# Altium PCB 12V DC.PcbDoc
Units mil, origin at the board's own origin, x right, y up, seen from the top; angles counter-clockwise.
Board outline 4500 x 1800 mil, 2 copper layers (Top Layer, Bottom Layer); 40 components, 24 nets, 114 pads, 16 vias.
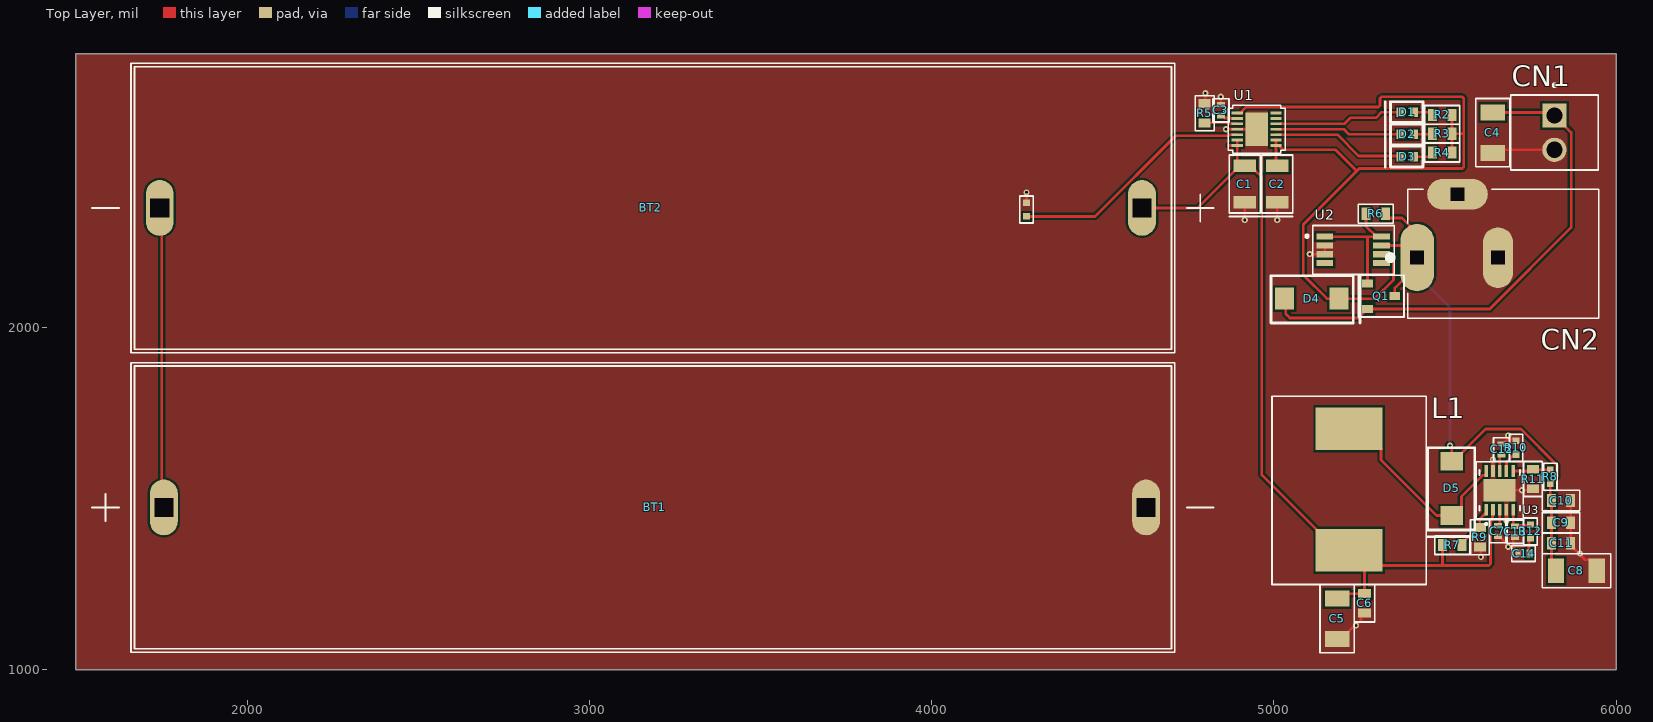
[diagram p0: Top Layer view]
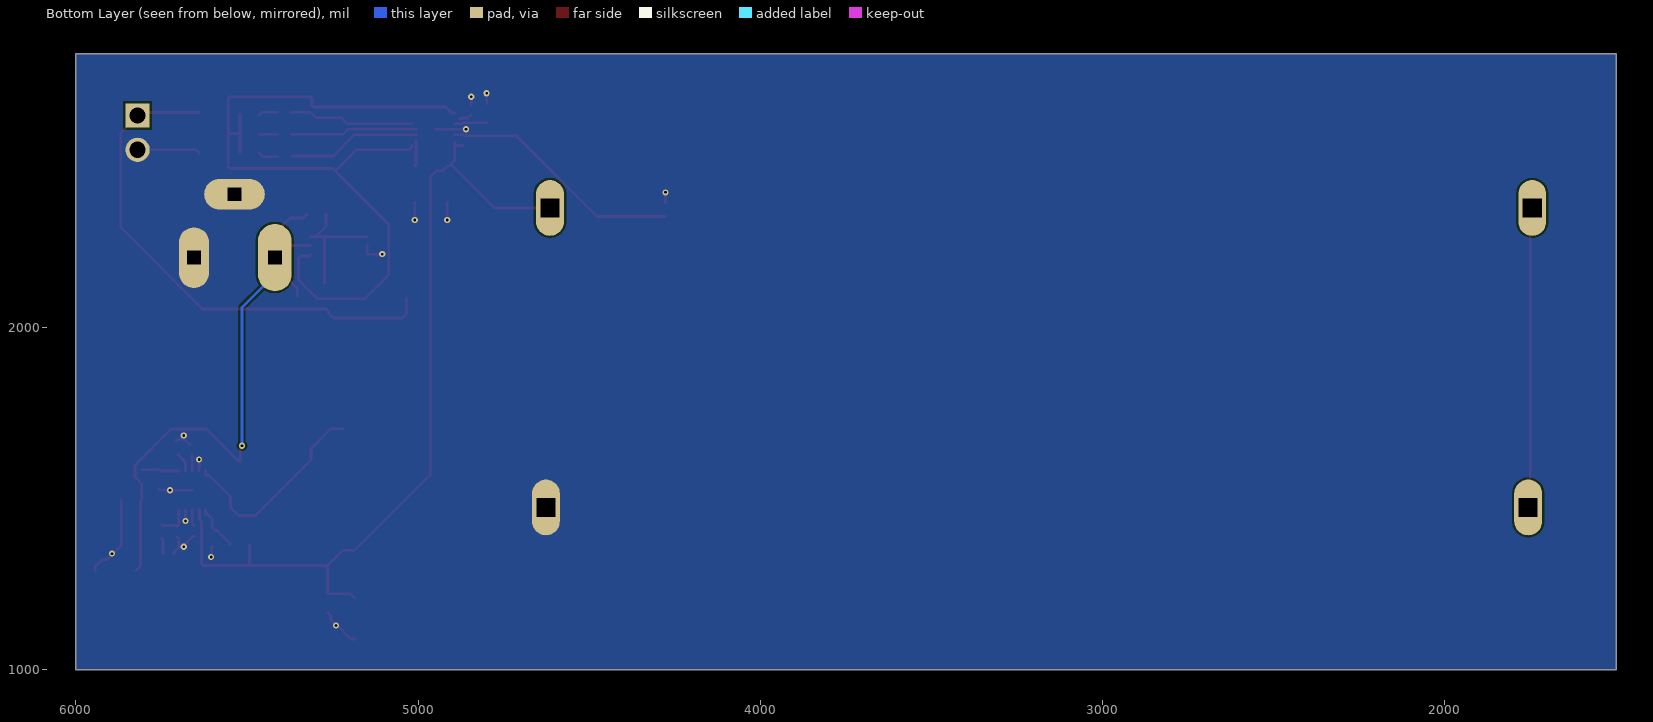
[diagram p1: Bottom Layer view, seen from below]
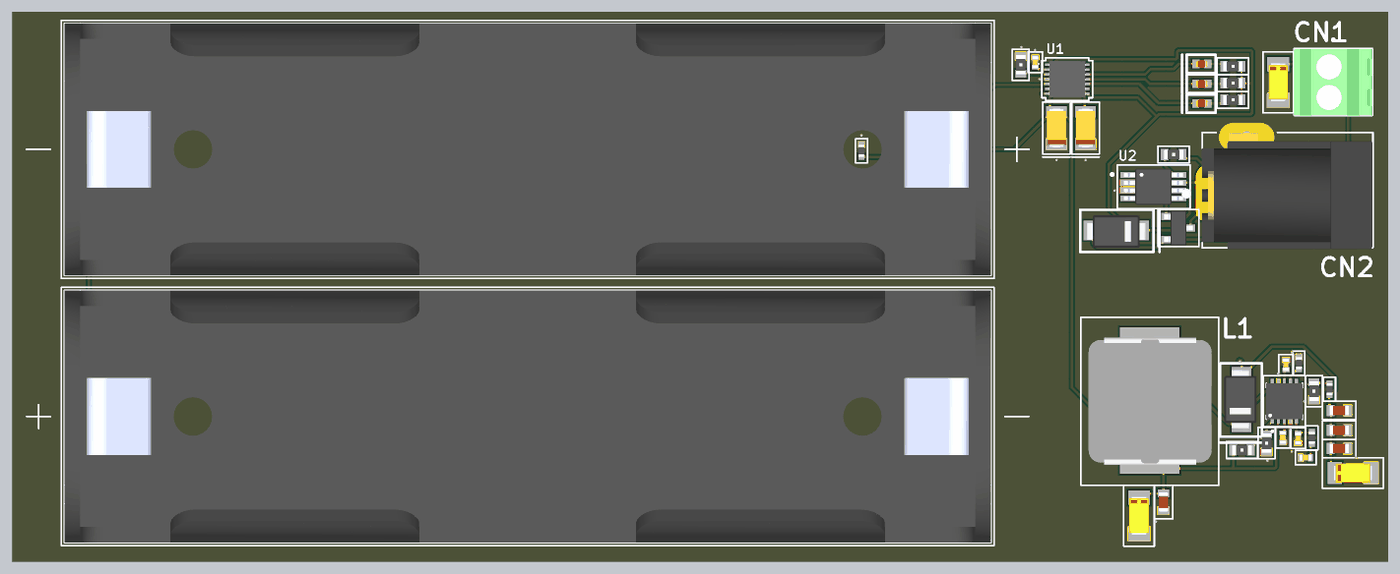
[diagram p2: 3D render of the assembled board from above, using the file's embedded part models]

## Layer stack, top to bottom
Top Solder: solder mask 0.4, Solder Resist, Dk 3.5
Top Layer: signal copper 1.4
Dielectric 1: dielectric 12.6, FR-4, Dk 4.8
Bottom Layer: signal copper 1.4
Bottom Solder: solder mask 0.4, Solder Resist, Dk 3.5

## Board outline
1500,2800 6000,2800 6000,1000 1500,1000

## Design rules (kind name [scope] priority, off if disabled: settings)
Clearance Clearance_1 [InNet('EXT_5V') vs InNet('VDD33')] p1: gap=20 ignorepadtopadclearanceinfootprint=FALSE
Clearance PWR_clearence [InNetClass('PWR') vs InNetClass('PWR')] p2: gap=15 ignorepadtopadclearanceinfootprint=TRUE
Clearance clearance [All] p3: gap=6 ignorepadtopadclearanceinfootprint=TRUE except(0: SMDPad-Via SMDPad-Hole THPad-Via)
ComponentClearance [All] p1: gap=10 collisioncheckmode=3 verticalgap=10 showdistances=TRUE
DiffPairsRouting 24 [InDifferentialPair('24RF')] p1: maxlimit=8 minlimit=5 mostfreqgap=8 toplayer_mingap=8 toplayer_minwidth=8 toplayer_maxwidth=8 toplayer_prefwidth=8 bottomlayer_maxgap=5 bottomlayer_prefgap=5 bottomlayer_minwidth=4.17 bottomlayer_maxwidth=4.17 bottomlayer_prefwidth=4.17 impedanceprofiledriven=TRUE maxuncoupledlength=500
DiffPairsRouting 09 [InDifferentialPair('09RF')] p2: maxlimit=8 minlimit=5 mostfreqgap=8 toplayer_mingap=8 toplayer_minwidth=8 toplayer_maxwidth=8 toplayer_prefwidth=8 bottomlayer_maxgap=5 bottomlayer_prefgap=5 bottomlayer_minwidth=4.17 bottomlayer_maxwidth=4.17 bottomlayer_prefwidth=4.17 impedanceprofiledriven=TRUE maxuncoupledlength=500
HoleSize [All] p1: absolutevalues=TRUE maxlimit=196.85 minlimit=1 maxpercent=80.000 minpercent=20.000
MatchedLengths [InNetClass('SPI')] p1: tolerance=5 checknetsindiffpair=FALSE checkdiffpairvsdiffpair=TRUE checkxsignals=TRUE checkothers=TRUE
MinimumSolderMaskSliver [All] p1: minsoldermaskwidth=2
NetAntennae [All] p1: netantennaetolerance=3
PlaneClearance [All] p1: clearance=10
PlaneConnect [All] p1: planeconnectstyle=Direct reliefexpansion=20 reliefentries=4 reliefconductorwidth=10 reliefairgap=10
PolygonConnect [All] p1: connectstyle=Direct reliefconductorwidth=10 reliefentries=4 polygonreliefangle="90 Angle" airgapwidth=0
PolygonConnect PolygonConnect_1 [All] p2: connectstyle=Direct reliefconductorwidth=10 reliefentries=4 polygonreliefangle="90 Angle" airgapwidth=10
PolygonConnect GND [InNet('GND')] p3: connectstyle=Direct reliefconductorwidth=10 reliefentries=4 polygonreliefangle="90 Angle" airgapwidth=10
PolygonConnect PWR [InNet('VBAT') or InNet('5VSYS')  or InNet('NetL1_1')] p4: connectstyle=Direct reliefconductorwidth=10 reliefentries=4 polygonreliefangle="90 Angle" airgapwidth=10
PolygonConnect VDD33 [InNet('VDD33')] p5: connectstyle=Direct reliefconductorwidth=10 reliefentries=4 polygonreliefangle="90 Angle" airgapwidth=10
PolygonConnect PWRHOLE [InNet('5VSYS') vs (ObjectKind = 'Pad') And (Layer = 'MultiLayer') And (Net = '5VSYS')] p6: connectstyle=Direct reliefconductorwidth=10 reliefentries=4 polygonreliefangle="90 Angle" airgapwidth=10
RoutingVias [All] p1: holewidth=8 width=18 viastyle="Through Hole" minholewidth=6 minwidth=6 maxholewidth=25 maxwidth=40
SilkToSilkClearance [All] p1: silktosilkclearance=1
SilkToSolderMaskClearance [IsPad] p1: minsilkscreentomaskgap=0 clearancetoexposedcopper=TRUE
SolderMaskExpansion [All] p1: expansion=2 istentingtop=FALSE useseparateexpansions=TRUE expansionbottom=2 istentingbottom=FALSE
UnRoutedNet [All] p1: checkbadconnections=TRUE
Width [All] p1: maxlimit=80 minlimit=6 preferedwidth=6 minimp=50.000000 maximp=50.000000 favimp=50.000000
20 further rules are at their usual default settings.

## Components (designator, comment, footprint, x,y, rotation, side; value= is the part's Value field where it differs from the comment)
BT1 "BK-18650-PC2" 18650 3185.87,1475 r0 top
BT2 "BK-18650-PC2" 18650 3185.87,2350 r180 top
C1 "CAP_POL" CAP_3216 4915,2420 r90 top value=10uF
C2 "CAP_POL" CAP_3216 5010,2420 r90 top value=10uF
C3 "Capacitor_0402" Capacitor_0402 4845,2635 r270 top value=100nF
C4 "CAP_1206" CAP_1206 5640,2570 r90 top value=47uf
C5 "CAP_1206" CAP_1206 5185,1150 r90 top value=47uf
C6 "Capacitor_0603" Capacitor_0603 5265,1195 r90 top value=4.7uF
C7 "Capacitor_0402" Capacitor_0402 5655.36,1406.36 r90 top value=1uF
C8 "CAP_1206" CAP_1206 5884.25,1290 r180 top value=47uf
C9 "Capacitor_0603" Capacitor_0603 5839.25,1430 r180 top value=4.7uF
C10 "Capacitor_0603" Capacitor_0603 5839.25,1495 r0 top value=4.7uF
C11 "Capacitor_0603" Capacitor_0603 5839.25,1370 r180 top value=4.7uF
C12 "Capacitor_0402" Capacitor_0402 5665,1643.89 r270 top value=1nF
C13 "Capacitor_0402" Capacitor_0402 5705.36,1404.36 r90 top value=5.1pF
C14 "Capacitor_0402" Capacitor_0402 5730,1340 r0 top value=560pF
CN1 "2 Position Wire Terminal" 282834-2 5820,2570 r270 top
CN2 "PJ-202A" PJ-202A 5674.69,2204 r0 top
D1 "LED" LED_0402 5370.63,2630 r0 top
D2 "LED" LED_0402 5370.63,2565 r0 top
D3 "LED" LED_0402 5370.63,2500 r0 top
D4 "CDBA240LL-HF" DO-214AC 5031.34,2085 r0 top
D5 "CDBA240LL-HF" DO-214AC 5520,1610 r270 top
L1 "IHLP4040DZER5R6M01" Inductor_4040 5220,1350 r90 top value="100 kHz"
Q1 "DMP2045U-7" SOT-23 5310,2095 r270 top
R1 "Thermistor_0402" Resistor_0402 4275,2345 r90 top value=10K
R2 "Resistor_0603" Resistor_0603 5490,2620 r180 top value=2K
R3 "Resistor_0603" Resistor_0603 5490,2565 r180 top value=2K
R4 "Resistor_0603" Resistor_0603 5490,2510 r180 top value=2K
R5 "Resistor_0603" Resistor_0603 4800,2625 r270 top value=1.78K
R6 "Resistor_0603" Resistor_0603 5300,2335 r0 top value=47
R7 "Resistor_0603" Resistor_0603 5519.46,1363 r180 top value=620K
R8 "Resistor_0402" Resistor_0402 5810,1565 r270 top value=130K
R9 "Resistor_0603" Resistor_0603 5600,1390 r90 top value=205
R10 "Resistor_0402" Resistor_0402 5710,1650 r270 top value=97.6K
R11 "Resistor_0603" Resistor_0603 5755,1560 r90 top value=20.5K
R12 "Resistor_0402" Resistor_0402 5747.61,1404.47 r90 top value=118K
U1 "AAT3663IWO-8.4-2-T1" 14-TDFN 4950,2580 r0 top
U2 "LTC4414EMS8#PBF" 8-MSOP 5231.93,2227.8 r0 top
U3 "LT8362EDD#PBF" 10-DFN 5660,1525 r90 top

## Footprints (in the part's own frame and the unit in brackets; to place one, negate y for a bottom-side part, rotate by r counter-clockwise, add the part's x,y. Pads: shape width x height; smd on the part's side, far side on the other; paste and mask are expansions set on the pad)
8-MSOP [mm]
  rect 1.25x0.46 smd: 1(-2.11,0.975) 2(-2.11,0.325) 3(-2.11,-0.325) 4(-2.11,-0.975) 5(2.11,-0.975) 6(2.11,-0.325) 7(2.11,0.325) 8(2.11,0.975)
  silkscreen extent -3.53,-1.83 3.05,1.8, body extent -2.45,-1.5 2.45,1.5, height 1.1
10-DFN [mm]
  rect 0.86x0.27 smd mask+0.05: 1(-1.435,1) 2(-1.435,0.5) 3(-1.435,0) 4(-1.435,-0.5) 5(-1.435,-1) 6(1.435,-1) 7(1.435,-0.5) 8(1.435,0) 9(1.435,0.5) 10(1.435,1)
  rect 1.65x2.38 smd paste-2 mask+0.05: 11(0,0)
  silkscreen extent -2.55,-1.75 2.11,1.75, body extent -1.5,-1.5 1.5,1.5, height 0.8
14-TDFN [mm]
  rect 0.83x0.2 smd: 1(-1.44,1.2) 2(-1.44,0.8) 3(-1.44,0.4) 4(-1.44,0) 5(-1.44,-0.4) 6(-1.44,-0.8) 7(-1.44,-1.2) 8(1.44,-1.2) 9(1.44,-0.8) 10(1.44,-0.4) 11(1.44,0) 12(1.44,0.4) 13(1.44,0.8) 14(1.44,1.2)
  rect 1.65x2.5 smd paste-2: 15(0,0)
  silkscreen extent -2.46,-1.78 2.11,1.78, body extent -1.55,-1.5 1.55,1.5, height 0.8
18650 [mm]
  oval 2.07x4.14 hole 1.38 square: 1(36.6,0) 2(-36.3,0)
  round 3.2 on Mech13: ""(-27.805,0) ""(27.81,0)
  silkscreen extent -41.63,-10.74 41.63,10.74, body extent -38.48,-10.49 38.48,10.49, height 21.42
282834-2 [mm]
  rect 1.8x1.8 hole 1.2: 1(-1.27,0)
  round 1.8 hole 1.2: 2(1.27,0)
  silkscreen extent -3.62,-3.25 2.77,3.25, body extent -2.77,-3.25 2.77,3.25, height 10.01
CAP_1206 [mm]
  rect 1.2x1.82 smd: 1(-1.505,0) 2(1.505,0)
  silkscreen extent -2.54,-1.27 2.54,1.27, body extent -1.6,-0.8 1.6,0.8, height 1.81
CAP_3216 [mm]
  rect 0.95x1.7 smd: 1(-1.35,0) 2(1.35,0)
  silkscreen extent -2.41,-1.14 2.16,1.14, body extent -1.6,-0.8 1.6,0.8, height 1.81
Capacitor_0402 [mm]
  rect 0.4x0.6 smd: 1(-0.416,0.009) 2(0.397,0.009)
  silkscreen extent -0.87,-0.59 0.85,0.61, body extent -0.51,-0.24 0.49,0.26, height 0.56
Capacitor_0603 [mil]
  rect 26x37 smd: 1(-28,0) 2(28,0)
  silkscreen extent -55,-30 55,30, body extent -31,-16 31,16, height 36
DO-214AC [mm]
  rect 1.4x1.64 smd: 1(0,0) 2(4.03,0)
  silkscreen extent -1,-1.8 5.6,1.7, body extent -0.5,-1.45 4.5,1.25, height 2.32
Inductor_4040 [mil]
  rect 125x195 smd: 1(0,0) 2(355,0)
  silkscreen extent -100,-225 450,225, body extent -34,-202 384,200, height 153
LED_0402 [mm]
  rect 0.6x0.7 smd: 1(0,0) 2(1,0)
  silkscreen extent -1.14,-0.76 1.65,0.76, body extent 0.01,-0.3 1.01,0.3, height 0.2
PJ-202A [mm]
  oval 2.5x5 hole 1 square: 1(-6.5,0.025)
  oval 2.25x4.5 hole 1 square: 2(-0.5,0.025)
  oval 4.5x2.25 hole 1 square: 3(-3.5,4.725)
  silkscreen extent -8.7,-4.47 6.98,5.11, body extent -7.24,-4.6 6.96,5.11, height 11.01
Resistor_0402 [mm]
  rect 0.475x0.5 smd: 1(-0.503,-0.061) 2(0.521,-0.061)
  silkscreen extent -0.99,-0.56 1.01,0.44, body extent -0.49,-0.31 0.51,0.19, height 0.36
Resistor_0603 [mm]
  rect 0.65x0.9 smd: 1(-0.776,-0.051) 2(0.674,-0.051)
  silkscreen extent -1.35,-0.75 1.25,0.65, body extent -0.85,-0.45 0.75,0.35, height 0.56
SOT-23 [mm]
  rect 0.6x0.8 smd: 1(0.066,1.106) 2(-0.884,-0.914) 3(1.016,-0.914)
  silkscreen extent -1.48,-1.61 1.62,1.79, body extent -1.38,-1.1 1.51,1.3, height 1.16

## Part data
BT1 BT2: library part "BATT HOLDER 18650 1 CELL PC PIN", Manufacturer Name 1="MPD (Memory Protection Devices)", ID=16, Manufacturer Name P/N 1=BK-18650-PC2, Pin=2, Price=$3.75
C1 C2: library part "CAP TANT 10uF 10V ±10%", Manufacturer Name 1=KEMET, Manufacturer Name 2=Vishay, Manufacturer Name P/N 1=B45196H2106K109, Manufacturer Name P/N 2=593D106X9010A2TE3, Operating Temperature="-55°C ~ 125°C", Tolerance=±10%, Voltage=10V, Features="Tantalum 3216-18 10uF", ID=6, Price=$0.064
C3: library part "CAP CER 100nF 50V ±10% X7R 0402", Manufacturer Name 1=KEMET, Manufacturer Name 2="Murata Electronics", Manufacturer Name P/N 1=C0402C104K5RACTU, Manufacturer Name P/N 2=GRM21BR71H104K01L, Operating Temperature="-55°C ~ 125°C", Tolerance=±10%, Voltage=50V, Features="0402 100nF", ID=1, Price=$0,010, Type=X7R
C4 C5 C8: library part "CAP TANT 47UF ±20% 6.3V 1206", Manufacturer Name 1="KYOCERA AVX", Operating Temperature="-55°C ~ 125°C", Tolerance=±20%, Voltage=6.3V, Features="Tantalum 1206 47uF", ID=10, Price=$0.42
C6 C9 C10 C11: library part "CAP CER 4.7UF ±10% 10V X5R 0603", Manufacturer Name 1="Samsung Electro-Mechanics", Manufacturer Name P/N 1=CL10A475KP8NNNC, Operating Temperature="-55°C ~ 85°C", Tolerance=±10%, Voltage=10V, Features="0603 4.7uF", ID=11, Price=$0.10, Type=X5R
C7: library part "CAP CER 1UF ±10% 6.3V X5R 0402", Manufacturer Name 1="Taiyo Yuden", Manufacturer Name P/N 1=JMK105BJ105KV-F, Operating Temperature="-55°C ~ 85°C", Tolerance=±10%, Voltage=6.3V, Features="0402 1uF", ID=12, Price=$0.10, Type=X5R
C12: library part "CAP CER 1NF 50V ±10% X7R 0402", Manufacturer Name 1=KEMET, Manufacturer Name P/N 1=C0402C102K5REC7867, Operating Temperature="-55°C ~ 125°C", Tolerance=±10%, Voltage=50v, Features="0402 1NF", ID=9, Price=$0.10, Type=X7R
C13: library part "CAP CER 5.1PF ±0.25pF 50V C0G/NP0 0402", Manufacturer Name 1="Murata Electronics", Manufacturer Name P/N 1=GRM1555C1H5R1CA01D, Operating Temperature="-55°C ~ 125°C", Tolerance=±0.25pF, Voltage=50V, Features="0402 5.1PF", ID=13, Price=$0.10, Type=C0G/NP0
C14: library part "CAP CER 560PF ±5% 50V C0G/NP0 0402", Manufacturer Name 1="Murata Electronics", Manufacturer Name P/N 1=GRM1555C1H561JA01D, Operating Temperature="-55°C ~ 125°C", Tolerance=560pF, Voltage=50V, Features="0402 560pF", ID=14, Price=$0.10, Type=C0G/NP0
CN1: library part "TERM BLK 2P SIDE ENT 2.54MM PCB", Current Rating=10A, Manufacturer Name 1="TE Connectivity AMP Connectors", Manufacturer Name P/N 1=282834-2, ID=15, Pin=2, Price=$1.42
CN2: library part "CONN PWR JACK 2X5.5MM KINKED PIN", Manufacturer Name 1="CUI Devices", ID=1, Manufacturer Name P/N 1=PJ-202A, Pin=3, Price=$0.690
D1 D2 D3: library part "LED RED 0402", Current=30mA, Manufacturer Name 1=Vishay, Manufacturer Name P/N 1=VLMS1500-GS08, Power=0.06W, Voltage=2V, Features="RED 0402", ID=1, Pin=2, Price=$0.196
D4 D5: library part "DIODE SCHOTTKY 40V 2A DO214AC", Current=2A, Manufacturer Name 1="Comchip Technology", Operating Temperature="-55°C ~ 100°C", Voltage=40v, Features="DIODE SCHOTTKY", ID=7, Manufacturer Name P/N 1=CDBA240LL-HF, Pin=2
L1: library part "FIXED IND 5.6UH 8.5A 19.3MOHM SM", Current=8.5A, Manufacturer Name 1="Vishay Dale", Operating Temperature="-55°C ~ 125°C", Tolerance=±20%, Features="4040 8.5 A 19.3mOhm", ID=2, Manufacturer Name P/N 1=IHLP4040DZER5R6M01, Price=$1.40
Q1: library part "MOSFET P-CH 20V 4.3A SOT23-3", "P-Channel 20 V 4.3A (Ta) 800mW (Ta) Surface Mount SOT-23-3", Current=4.3A, Manufacturer Name 1="Diodes Incorporated", Operating Temperature="-55°C ~ 150°C (TJ)", Voltage="20 V", Features="P-Channel 8-MSOP  SOT23-3", ID=2, Manufacturer Name P/N 1=DMP2045U-7, Price=$0.46
R1: library part "THERMISTOR NTC 10K 3380K 0402 ±3%", Manufacturer Name 1="Panasonic Electronic Components", Manufacturer Name P/N 1=ERT-J0EG103HA, Operating Temperature="-40°C ~ 125°C", Power="66 mW", Tolerance=±3%, Features=CHIP0402, ID=11, Price=$0.11
R2 R3 R4: library part "CHIP RES 2K 100 mW 0603 ±1%", Manufacturer Name 1="Panasonic Electronic Components", Manufacturer Name P/N 1=ERJ-3EKF2001V, Operating Temperature="-55°C ~ 155°C", Power=100mW, Tolerance=±1%, Features=CHIP0603, ID=9, Price=$0.10
R5: library part "CHIP RES 1.78K 100 mW 0603 ±1%", Manufacturer Name 1="KOA Speer Electronics, Inc.", Manufacturer Name P/N 1=RK73H1JTTD1781F, Operating Temperature="-55°C ~ 155°C", Power=100mW, Tolerance=±1%, Features=CHIP0603, ID=10, Price=$0.10
R6: library part "CHIP RES 47 100 mW 0603 ±0.1%", Manufacturer Name 1=Vishay, Manufacturer Name 2="KOA Speer", Manufacturer Name P/N 1=MCS04020C4709FE000, Manufacturer Name P/N 2=RK73G1ETTP47R0F, Operating Temperature="-55°C ~ 125°C", Power=100mW, Tolerance=±1%, Features="CHIP 0603", ID=4, Price=$0.06
R7: library part "CHIP RES 620K 100mW 0603 ±1%", Manufacturer Name 1=YAGEO, Manufacturer Name P/N 1=RC0603FR-07620KL, Operating Temperature="-55°C ~ 155°C", Power=100mW, Tolerance=±1%, Features=CHIP0603, ID=12, Price=$0.10
R8: library part "CHIP RES 130K 100mW 0402 ±1%", Manufacturer Name 1="Panasonic Electronic Components", Manufacturer Name P/N 1=ERJ-2RKF1303X, Operating Temperature="-55°C ~ 155°C", Power=100mW, Tolerance=±1%, Features=CHIP0402, ID=14, Price=$0.10
R9: library part "CHIP RES 205 100 mW 0603  ±1%", Manufacturer Name 1=YAGEO, Manufacturer Name P/N 1=RC0603FR-07205RL, Operating Temperature="-55°C ~ 155°C", Power=100mW, Tolerance=±1%, Features=CHIP0603, ID=11, Price=$0.10
R10: library part "CHIP RES 97.6K 63 mW 0402 ±1%", Manufacturer Name 1=YAGEO, Manufacturer Name P/N 1=RC0402FR-0797K6L, Operating Temperature="-55°C ~ 155°C", Power=63mW, Tolerance=±1%, Features=CHIP0402, ID=10, Price=$0.10
R11: library part "CHIP RES 20.5K 100mW 0603 ±1%", Manufacturer Name 1=YAGEO, Manufacturer Name P/N 1=RC0603FR-0720K5L, Operating Temperature="-55°C ~ 155°C", Power=100mW, Tolerance=±1%, Features=CHIP0603, ID=15, Price=$0.10
R12: library part "CHIP RES 118K 100mW 0402 ±1%", Manufacturer Name 1="Panasonic Electronic Components", Manufacturer Name P/N 1=ERJ-2RKF1183X, Operating Temperature="-55°C ~ 155°C", Power=100mW, Tolerance=±1%, Features=CHIP0402, ID=13, Price=$0.10
U1: library part "IC BATT CHG LI-ION 2CELL 14TDFN", Manufacturer Name 1="Skyworks Solutions Inc.", Operating Current=1A, Operating Temperature="-40°C ~ 85°C (TA)", Operating Voltage=13.2V, Features="Charger IC Lithium", ID=13, Manufacturer Name P/N 1=AAT3663IWO-8.4-2-T1, Pin=14, Price=$0.00
U2: library part "IC OR CTRLR SRC SELECT 8MSOP", Manufacturer Name 1="Analog Devices Inc.", Operating Temperature="-40°C ~ 85°C", Operating Voltage="3V ~ 36V", Features="Source Selector Switch P-Channel", ID=15, Manufacturer Name P/N 1=LTC4414EMS8#PBF, Pin=8, Price=$6.02
U3: library part "IC REG BST SEPIC 2A 10DFN", Manufacturer Name 1="Analog Devices Inc.", Operating Current=2A, Operating Temperature="-40°C ~ 125°C (TJ)", Features="Boost, SEPIC Switching Regulator", ID=16, Manufacturer Name P/N 1=LT8362EDD#PBF, Pin=10, Price=$5.83

## Via types
v1: diameter 18, hole 8, Top Layer to Bottom Layer, tented both sides, 16 vias

## Nets (pads, with @x,y where several pads share a name; then routed paths per layer and width w, separated by ;. In a path a pad name is that pad's centre, name@x,y a point inside that pad or via, vN(x,y) a via of type N, cw(c..) or ccw(c..) an arc to the next point about the centre after c; other vN are vias at no path point)
GND: BT1.1 C1.1 C2.1 C3.1 C4.1 C5.1 C6.1 C7.1 C8.1 C9.1 C10.2 C11.1 C12.1 C13.1 C14.1 CN1.2 CN2.2 CN2.3 R1.2 R5.1 R9.1 R10.1 R11.1 U1.4 U1.15 U2.2 U2.3 U3.4 U3.9 U3.11 | length 1264
  Top Layer w8: R1.2 v1(4277.39,2395.53) ; R5.1 4800,2657.54 v1(4800,2685) ; v1(4845,2675) 4845.18,2674.82 4845.18,2651.55 C3.1 ; v1(4860,2580) U1.4 U1.15 ; v1(4915,2315) C1.1 ; v1(5010,2315) C2.1 ; v1(5105,2215) U2.3 U2.2 ; C5.1 5197.2,1090.75 5234.54,1128.09 5238.09,1128.09 v1(5240,1130) 5254.85,1144.85 5254.85,1158 5263.85,1167 C6.1 ; R9.1 5605,1356.46 v1(5605,1330) ; v1(5640,1615) 5640.16,1614.84 5640.16,1581.65 U3.9 ; C4.1 5649.25,2520 CN1.2 ; C7.1 5658.94,1390 5683.09,1365.85 5683.09,1361.91 v1(5685,1360) 5699.32,1360 5699.32,1384.13 5703.19,1388 C13.1 ; U3.11 v1(5725,1525) 5752.54,1525 R11.1 ; C12.1 5669.3,1660.26 5683.09,1674.04 ; U3.4 5679.84,1468.35 5679.84,1435.16 v1(5680,1435) ; v1(5685,1685) 5685,1675.08 5702.32,1675.08 R10.1 ; 5699.85,1358.09 5713.64,1344.3 C14.1 ; C10.2 C9.1 C11.1 5867.25,1364.5 5909.93,1321.83 5923.88,1321.83 5943.5,1302.2 C8.1
  other v1: 5895,1340
NetBT1_2: BT1.2 BT2.1 | length 879.9
  Top Layer w8: BT2.1 1750.83,2344.09 1750.83,1480.91 BT1.2
NetC3_2: C3.2 U1.2 | length 38.8
  Top Layer w8: C3.2 4849.3,2619.36 4855.67,2613 4873.67,2613 4875.11,2611.56 U1.2@4880.97,2611.56
NetC7_2: C7.2 U3.3 | length 49.2
  Top Layer w8: C7.2 5656.13,1422 5660,1425.87 U3.3
NetC12_2: C12.2 U3.8 | length 48
  Top Layer w8: U3.8 5660.18,1581.68 5660.18,1629.18 C12.2@5660.36,1629.36
NetC13_2: C13.2 R12.2 U3.5 | length 98.9
  Top Layer w8: U3.5 5699.37,1423.87 5703.24,1420 C13.2 5707.5,1422.5 5747.5,1422.5 R12.2
NetC14_2: C14.2 R12.1 | length 46.1
  Top Layer w8: C14.2 5745.64,1380.32 R12.1
NetD1_1: D1.1 U1.12 | length 365.8
  Top Layer w8: U1.12@5019.03,2595.81 5205.81,2595.81 5223.24,2613.24 5298.04,2613.24 5314.8,2630 D1.1
NetD1_2: D1.2 R2.2 | length 56.8
  Top Layer w8: D1.2 5455.46,2630 R2.2
NetD2_1: D2.1 U1.11 | length 370.2
  Top Layer w8: U1.11 5205,2580 5220,2565 D2.1
NetD2_2: D2.2 R3.2 | length 54.3
  Top Layer w8: D2.2 5461.46,2565 R3.2
NetD3_1: D3.1 U1.10 | length 390.6
  Top Layer w8: U1.10 5185.75,2564.25 5248.03,2501.97 5368.66,2501.97 D3.1
NetD3_2: D3.2 R4.2 | length 60.3
  Top Layer w8: D3.2 5454.66,2500 5463.46,2508.8 R4.2
NetD5_2: D5.2 L1.2 U3.10 | length 604.3
  Top Layer w8: L1.2 5255,1705 5313.5,1646.5 5313.5,1613.56 5475.72,1451.34 D5.2 5524.72,1451.34 5548.28,1474.9 5548.28,1506.76 5610.22,1568.69 5619.31,1568.69 5620.63,1570.01 U3.10
NetQ1_2: Q1.2 R6.1 U2.1 U2.8 | length 382.2
  Top Layer w8: U2.1 5275,2266.18 ; R6.1 5269.46,2296.17 U2.8@5299.45,2266.18 ; Q1.2 5274,2265.18 5275,2266.18 ; U2.8 U2.8@5299.45,2266.18 ; 5275,2266.18 U2.8@5299.45,2266.18
NetR1_1: R1.1 U1.5 | length 714.9
  Top Layer w8: R1.1 4477.7,2325.21 4713.48,2561 4867.87,2561 4871.12,2564.25 U1.5
NetR5_2: R5.2 U1.3 | length 96.9
  Top Layer w8: R5.2 4798.54,2599 4867.87,2599 4871.06,2595.81 4893.24,2595.81 U1.3
NetR7_1: R7.1 R9.2 U3.1 | length 137.7
  Top Layer w8: R7.1 5550,1369.92 5587.83,1407.75 5593.2,1407.75 R9.2 5602,1441.34 5616.24,1455.57 5619.31,1455.57 5620.63,1456.89 U3.1
NetR8_1: R8.1 R11.2 U3.6 | length 111.1
  Top Layer w8: U3.6 5751.95,1581.5 R11.2 5758.76,1584.79 R8.1
NetR10_2: R10.2 U3.7 | length 57.8
  Top Layer w8: U3.7 5679.69,1607.04 5702.12,1629.47 R10.2@5702.61,1629.47
VBATT: BT2.2 C1.2 C5.2 C6.2 L1.1 R7.2 U1.6 U1.7 U3.2 | length 2549.8
  Top Layer w8: BT2.2 4777.09,2350 4900.24,2473.15 4908.01,2473.15 4893.31,2487.85 U1.7 ; 4867.76,2532.76 U1.7 ; 4893.31,2543.31 U1.7 ; C1.2 4929.7,2458.45 4946.55,2458.45 4965,2440 4965,1570 5185,1350 L1.1 L1.1@5265,1305 ; C5.2 5198.75,1223 C6.2 L1.1@5265,1305 ; R7.2 5492.91,1307.09 5495,1305 ; U3.2 5639,1467.19 5639,1439.83 5633.19,1434.02 5633.19,1309.69 5628.5,1305 5495,1305 ; L1.1@5265,1305 5495,1305
VEXT: C2.2 D4.2 R2.1 R3.1 R4.1 U1.1 U1.8 U1.9 U2.6 | length 2482.9
  Top Layer w8: U1.1 4905.58,2627.24 4905.65,2627.31 4905.65,2630.06 4907.52,2631.93 4907.52,2633.35 4919.16,2645 5305.31,2645 5310,2649.69 5310,2670.31 5314.69,2675 5550.31,2675 5555,2670.31 5555,2570 ; U1.9 U1.8 5006.69,2476.46 C2.2 ; U1.8@5019.03,2532.69 5019.03,2527.5 5026.53,2520 5180,2520 5242.36,2457.64 ; U2.6 5320.06,2209.94 5343.67,2209.94 5349.61,2204.01 5349.61,2139.61 5295,2085 D4.2 5155,2085 5086,2154 5086,2301.28 5242.36,2457.64 ; R4.1 R3.1 ; R2.1 R3.1 ; 5242.36,2457.64 5249.72,2465 5550.31,2465 5555,2469.69 5555,2570 ; R3.1 5552,2567 5555,2570
VLOAD: C4.2 CN1.1 D4.1 Q1.3 | length 1529.3
  Top Layer w8: D4.1@5035,2088 5035,2040.45 5046.79,2028.66 5212.6,2028.66 5212.7,2028.77 5247.77,2028.77 5262.25,2043.25 5262.25,2047.19 5270.06,2055 5631.02,2055 5868.93,2292.91 5868.93,2571.07 CN1.1 5810.75,2629.25 C4.2
VREG: C8.2 C9.2 C10.1 C11.2 CN2.1 D5.1 Q1.1 R6.2 R8.2 U2.7 | length 1793.9
  Top Layer w8: U2.7 5399.41,2240.59 5420,2220 CN2.1@5420,2246.64 ; R6.2 5326.54,2329.6 5335.34,2320.81 5374.19,2320.81 5418.78,2276.22 CN2.1@5418.78,2246.64 ; Q1.1 5353.53,2116.21 5375.8,2138.49 5377.01,2138.49 5418.78,2180.26 CN2.1 CN2.1@5418.78,2220 ; v1(5515,1655) 5515,1652.29 5520,1647.29 D5.1 5524.72,1610 5618.72,1704 5721.73,1704 5827.45,1598.28 5827.45,1563.82 5808.1,1544.47 R8.2 5807.61,1498.64 C10.1 C9.2 C11.2 5811.25,1303.75 C8.2
  Bottom Layer w8: CN2.1 5418.78,2155.79 5515,2059.57 v1(5515,1655)
pads on no net: BT1. BT2. U1.13 U1.14 U2.4 U2.5

## Polygon pours and split planes (outlines as drawn)
GND on Bottom Layer "GND_L02_P000" (solid, remove dead copper, pour order 0): 1500,2800 6000,2800 6000,1000 1500,1000
GND on Top Layer "GND_L01_P002" (solid, pour order 2): 1500,2800 6000,2800 6000,1000 1500,1000